# Altium PCB file_6967cc6d432e67.85601328.pcbdoc
Units mm, origin at the board's own origin, x right, y up, seen from the top; angles counter-clockwise.
Board outline 69.52 x 52.06 mm, 2 copper layers (Top, Bottom), stack 1.57 mm thick; 47 components, 38 nets, 166 pads, 70 vias.
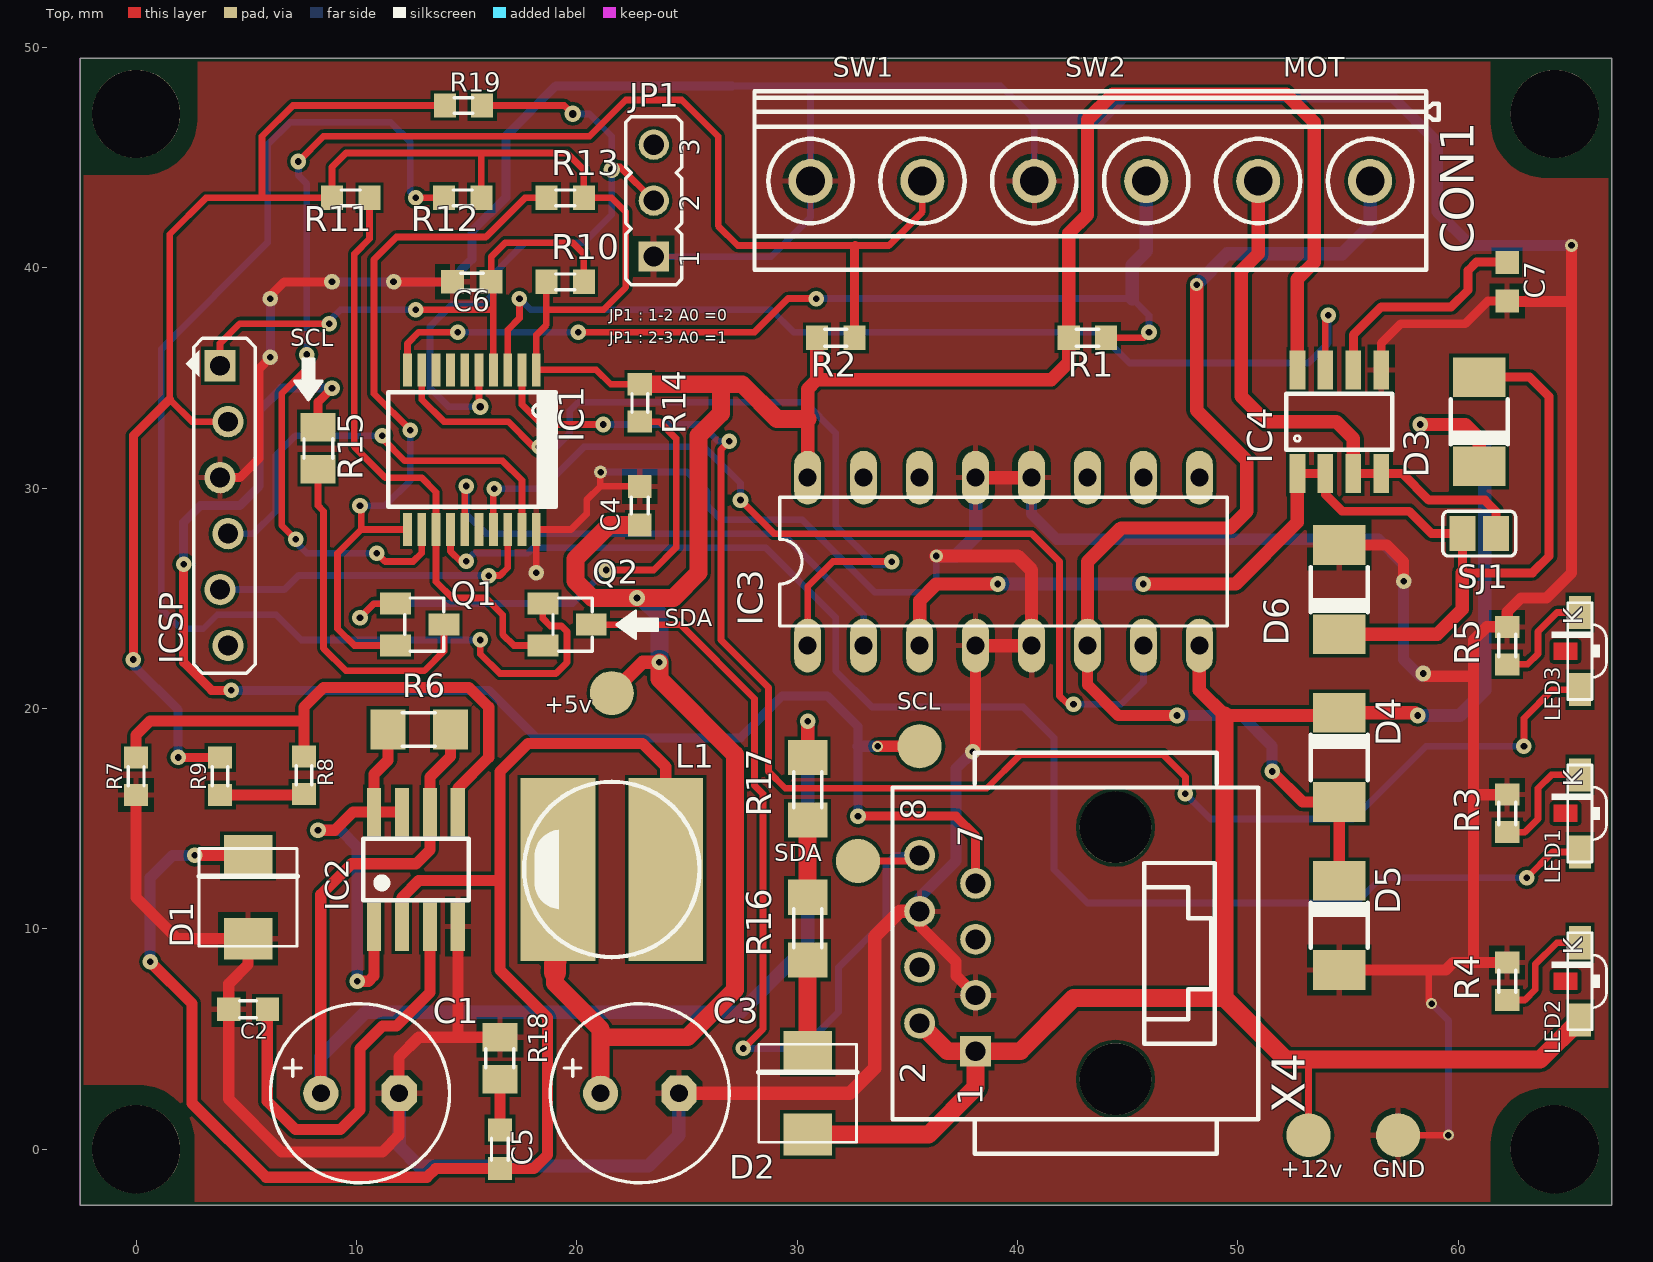
[diagram p0: Top view]
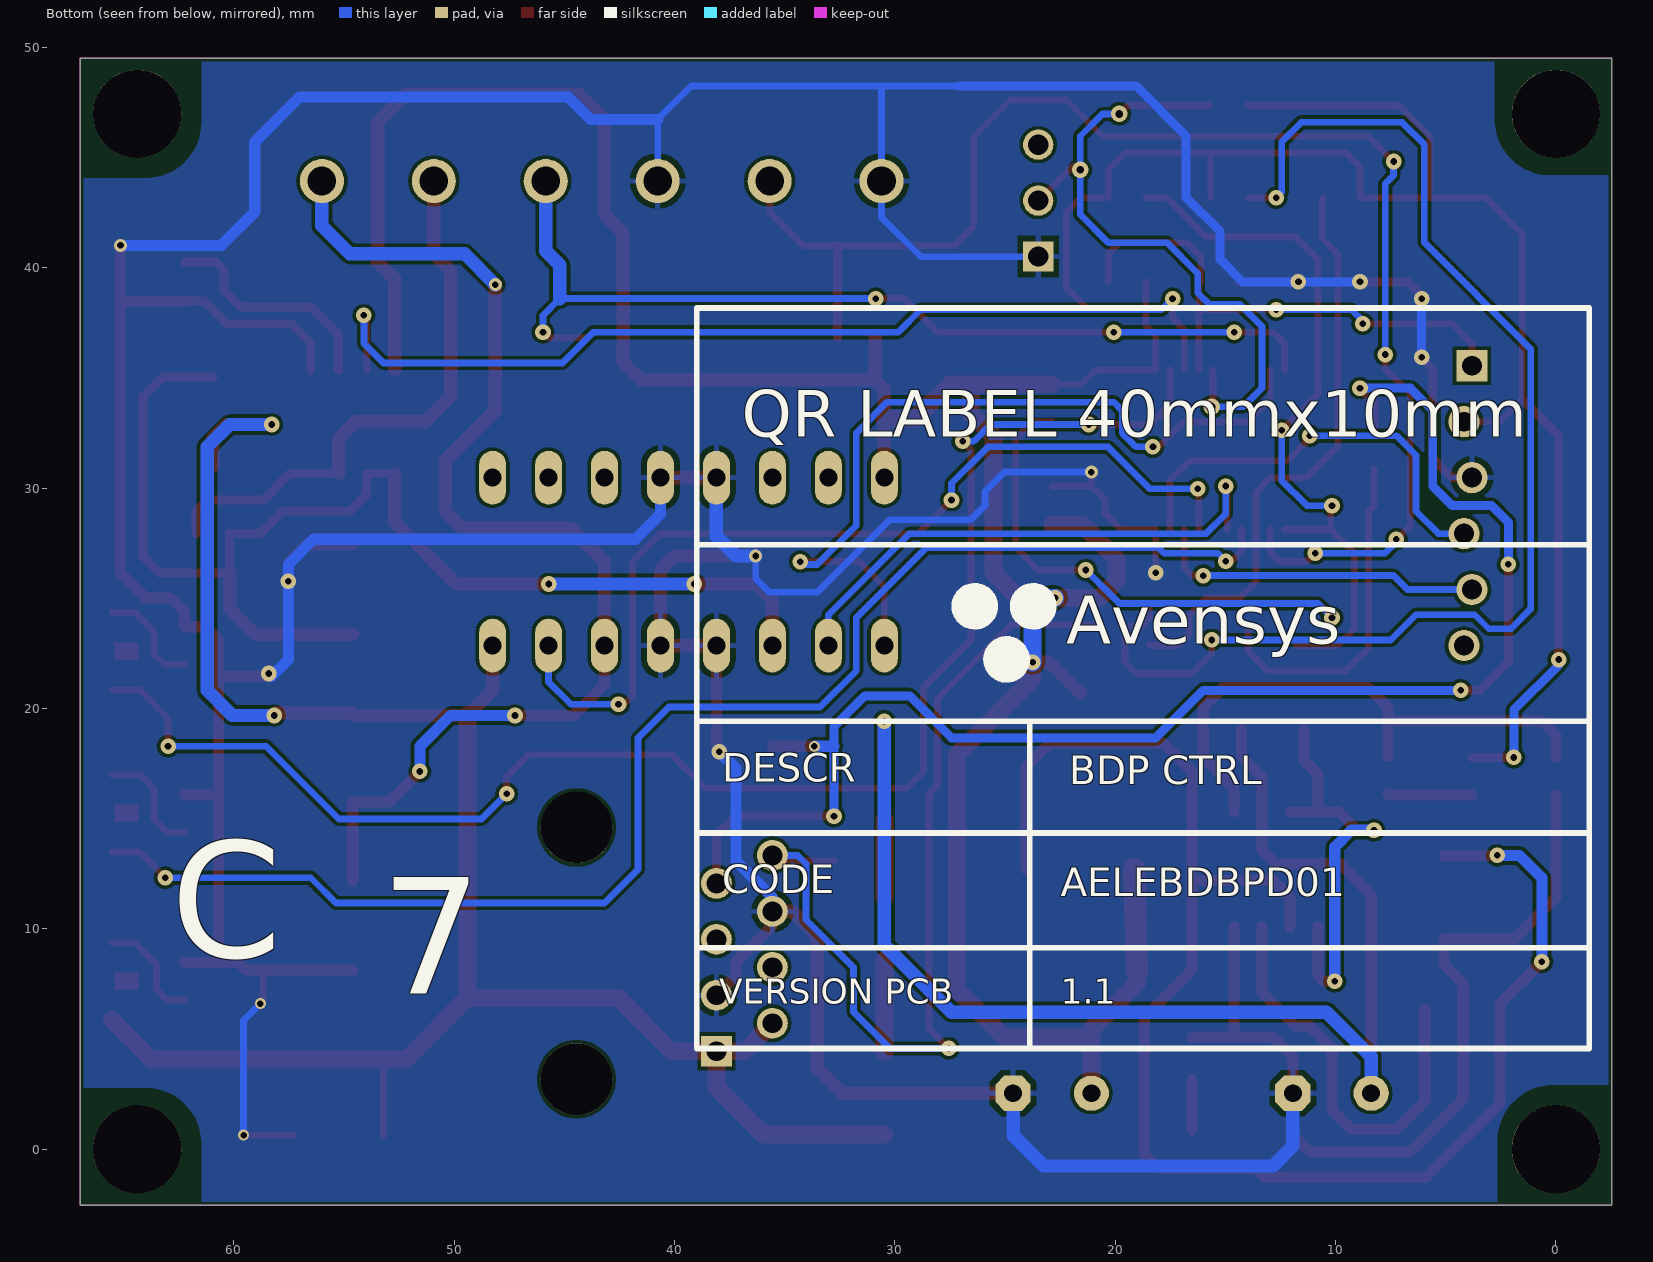
[diagram p1: Bottom view, seen from below]

## Layer stack, top to bottom
Top Solder: solder mask 0.0102, Solder Resist, Dk 3.5
Top: signal copper 0.035
Dielectric 1: core 1.5, FR-4, Dk 4.8
Bottom: signal copper 0.035
Bottom Solder: solder mask 0.0102, Solder Resist, Dk 3.5

## Board outline
-2.54,-2.54 66.98,-2.54 66.98,49.52 -2.54,49.52

## Design rules (kind name [scope] priority, off if disabled: settings)
Clearance [All] p1: gap=0.152 except(0: SMDPad-SMDPad SMDPad-THPad SMDPad-Via)
Clearance "Clearance (Same Net)" [All] p2: gap=0 except(0.152: SMDPad-SMDPad SMDPad-THPad SMDPad-Via)
HoleSize HoleSize_1 [All] p1: absolutevalues=TRUE maxlimit=2540 minlimit=0.35 maxpercent=80.000 minpercent=20.000
HoleSize [All] p2: absolutevalues=TRUE maxlimit=2.54 minlimit=0.025 maxpercent=80.000 minpercent=20.000
HoleToHoleClearance mdViaViaSameLayer [All] p1: gap=0.152 allowstackedmicrovias=TRUE
HoleToHoleClearance [All] p2: gap=0.254 allowstackedmicrovias=TRUE
PasteMaskExpansion mlMinCreamFrame [All] p1: expansion=0
PasteMaskExpansion [All] p2: expansion=0
PolygonConnect ThermalVias [IsVia] p1: connectstyle=Direct reliefconductorwidth=0.254 reliefentries=4 polygonreliefangle="90 Angle" airgapwidth=0.254
PolygonConnect [All] p2: connectstyle=Relief reliefconductorwidth=0.254 reliefentries=4 polygonreliefangle="90 Angle" airgapwidth=0.254
RoutingVias [All] p1: holewidth=0.711 width=1.27 viastyle="Through Hole" minholewidth=0.711 minwidth=1.27 maxholewidth=0.711 maxwidth=1.27
SilkToSilkClearance [All] p1 off: silktosilkclearance=0.254
SilkToSolderMaskClearance [IsPad] p1 off: minsilkscreentomaskgap=0.254 clearancetoexposedcopper=TRUE
SolderMaskExpansion mlMinStopFrame [All] p1: expansion=0.102
SolderMaskExpansion [All] p2: expansion=0.102
Width Width_1 [All] p1: maxlimit=2540 minlimit=0.152 preferedwidth=0.254
Width [All] p2: maxlimit=0.254 minlimit=0.254 preferedwidth=0.254
25 further rules are at their usual default settings.

## Components (designator, comment, footprint, x,y, rotation, side; value= is the part's Value field where it differs from the comment)
C1 "100uF 50V" E3,5-8 10.16,2.54 r0 top
C2 "470pF(0603)" C0603K 5.08,6.35 r180 top
C3 "330uF 16V" E3,5-8 22.86,2.54 r0 top
C4 "100nF(0603)" C0603K 22.86,29.21 r90 top
C5 "470pF(0603)" C0603K 16.51,0 r270 top
C6 "100nF(0603)" C0603K 15.24,39.37 r180 top
C7 "1nF(0603)" C0603K 62.23,39.37 r90 top
CON1 "Comment" MKDSN1,5/6-5,08 56.007,43.942 r180 top
D1 "" DO-214AC#1 5.08,11.43 r90 top
D2 "" DO-214AC#1 30.48,2.54 r90 top
D3 "1N4001" DO-214AC#2 60.96,33.02 r90 top
D4 "1N4001" DO-214AC#2 54.61,17.78 r270 top
D5 "1N4001" DO-214AC#2 54.61,10.16 r270 top
D6 "1N4001" DO-214AC#2 54.61,25.4 r90 top
IC1 "PIC16F1508_I/SS" MICROCHIP_13_SSOP20 15.24,31.75 r180 top
IC2 "CLIMA_LIB_MC34063EBD" CLIMA_LIB_SO8_PWR 12.7,12.7 r0 top
IC3 "L293D" DIL16 39.37,26.67 r0 top
IC4 "ACS712" SO08 54.61,33.02 r0 top
ICSP "" 1X06 3.81,29.21 r270 top
JP1 "" JP2R 23.495,43.053 r90 top
L1 "VLP8040T-181M" L_SMD_8X8 21.59,12.7 r180 top
LED1 "" CLIMA_LIB_LED_SMD_1204 65.532,15.24 r90 top
LED2 "" CLIMA_LIB_LED_SMD_1204 65.532,7.62 r90 top
LED3 "" CLIMA_LIB_LED_SMD_1204 65.532,22.606 r90 top
Q1 "2N7002,215" SOT23 12.87,23.81 r270 top
Q2 "2N7002,215" SOT23 19.56,23.81 r270 top
R1 "10K" RESISTOR_R0603 43.18,36.83 r180 top
R2 "10K" RESISTOR_R0603 31.75,36.83 r180 top
R3 "1K" RESISTOR_R0603 62.23,15.24 r90 top
R4 "1K" RESISTOR_R0603 62.23,7.62 r90 top
R5 "1K" RESISTOR_R0603 62.23,22.86 r90 top
R6 "0R33(1206)" R1206 12.852,19.05 r180 top
R7 "10K" R0603 0,16.93 r90 top
R8 "15K" R0603 7.62,16.979 r270 top
R9 "15K" R0603 3.81,16.93 r90 top
R10 "10K" R0603 19.47,39.37 r0 top
R11 "15K" R0603 9.74,43.18 r180 top
R12 "22R" R0603 14.82,43.18 r180 top
R13 "15K" R0603 19.47,43.18 r0 top
R14 "22R" R0603 22.86,33.87 r270 top
R15 "6R8(0805)" M0805 8.255,31.811 r270 top
R16 "0R33(1206)" R1206 30.48,10.008 r90 top
R17 "0R33(1206)" R1206 30.48,16.358 r90 top
R18 "6R8 (0805)" M0805 16.51,4.13 r90 top
R19 "10K" R0603 14.859,47.371 r0 top
SJ1 "" JUMPER_SJ 60.96,27.94 r180 top
X4 "" MY_TOUCHSCREEN_RJ45-VERTICAL 44.45,8.89 r90 top

## Footprints (in the part's own frame and the unit in brackets; to place one, negate y for a bottom-side part, rotate by r counter-clockwise, add the part's x,y. Pads: shape width x height; smd on the part's side, far side on the other; paste and mask are expansions set on the pad)
1X06 [mil] "1X06"
  rect 56x56 hole 35.43: 1(-250,0)
  round 56 hole 35.43: 2(-150,14.17) 3(-50,0) 4(50,14.17) 5(150,0) 6(250,14.17)
  silkscreen extent -299,-61 299,63
C0603K [mm] "C0603K"
  rect 1.05x1.08 smd: 1(-0.875,0) 2(0.875,0)
CLIMA_LIB_LED_SMD_1204 [mm] "CLIMA_LIB_LED_SMD_1204"
  rect 1.5x1 smd: 1.K(1.75,0) 2.A(-1.75,0)
  Top region: -0.4,0.1 0.4,0.1 0.4,1.2 -0.4,1.2
  silkscreen extent -2.2,-1.21 2.2,1.3
CLIMA_LIB_SO8_PWR [mm] "CLIMA_LIB_SO8_PWR"
  rect 0.65x2.2 smd: 1(-1.905,-2.6) 2(-0.635,-2.6) 3(0.635,-2.6) 4(1.905,-2.6) 5(1.905,2.6) 6(0.635,2.6) 7(-0.635,2.6) 8(-1.905,2.6)
  silkscreen extent -2.4,-1.4 2.4,1.39
DIL16 [mil] "DIL16"
  oval 48x96 hole 32: 1(-350,-150) 2(-250,-150) 3(-150,-150) 4(-50,-150) 5(50,-150) 6(150,-150) 7(250,-150) 8(350,-150) 9(350,150) 10(250,150) 11(150,150) 12(50,150) 13(-50,150) 14(-150,150) 15(-250,150) 16(-350,150)
  silkscreen extent -400,-115 400,115
DO-214AC#1 [mm] "DO-214AC"
  rect 1.9x2.2 smd: A(-1.88,0) K(1.88,0)
  silkscreen extent -2.22,-2.22 2.22,2.22
DO-214AC#2 [mm] "DO-214AC"
  rect 1.8x2.4 smd: A(2.025,0) C(-2.025,0)
  silkscreen extent -1.07,-1.3 1.02,1.3
E3,5-8 [mil] "E3,5-8"
  round 63 hole 32: +(-70,0)
  oct 63x63 hole 32: -(70,0)
  silkscreen extent -160,-160 160,160
JP2R [mil] "JP2R"
  rect 54x54 hole 36: 1(-100,0)
  round 54 hole 36: 2(0,0) 3(100,0)
  silkscreen extent -150,-50 150,50
JUMPER_SJ [mil] "JUMPER_SJ"
  rect 46x63 smd: 1(-30,0) 2(30,0)
  silkscreen extent -65,-40 65,40
L_SMD_8X8 [mm] "L_SMD_8X8"
  rect 3.4x8.3 smd: P$1(-2.45,0) P$2(2.45,0)
  silkscreen extent -3.98,-3.98 3.98,3.98
M0805 [mm] "M0805"
  rect 1.3x1.6 smd: 1(-0.95,0) 2(0.95,0)
MICROCHIP_13_SSOP20 [mm] "MICROCHIP_13_SSOP20"
  rect 0.4x1.5 smd: 1(-2.925,-3.625) 2(-2.275,-3.625) 3(-1.625,-3.625) 4(-0.975,-3.625) 5(-0.325,-3.625) 6(0.325,-3.625) 7(0.975,-3.625) 8(1.625,-3.625) 9(2.275,-3.625) 10(2.925,-3.625) 11(2.925,3.625) 12(2.275,3.625) 13(1.625,3.625) 14(0.975,3.625) 15(0.325,3.625) 16(-0.325,3.625) 17(-0.975,3.625) 18(-1.625,3.625) 19(-2.275,3.625) 20(-2.925,3.625)
  silkscreen extent -3.9,-2.6 3.8,2.6
MKDSN1,5/6-5,08 [mm] "MKDSN1,5/2-5,08"
  round 2 hole 1.3: 1(0,0) 2(5.08,0) 3(10.16,0) 4(15.24,0) 5(20.32,0) 6(25.4,0)
  silkscreen extent -3.11,-4.07 27.94,4.03, body extent -3.08,-4.04 27.97,4.06, height 10.03
MY_TOUCHSCREEN_RJ45-VERTICAL [mm] "MY_TOUCHSCREEN_RJ45-VERTICAL"
  round 3.25 hole 3.25: 1(-5.715,0) 1(5.715,0)
  rect 1.4x1.4 hole 0.9: 1(-4.445,6.35)
  round 1.4 hole 0.9: 2(-3.175,8.89) 3(-1.905,6.35) 4(-0.635,8.89) 5(0.635,6.35) 6(1.905,8.89) 7(3.175,6.35) 8(4.445,8.89)
  silkscreen extent -9.1,-6.47 9.1,10.12
R0603 [mm] "R0603"
  rect 1x1.1 smd: 1(-0.85,0) 2(0.85,0)
  silkscreen extent -0.43,-0.36 0.43,0.36
R1206 [mm] "R1206"
  rect 1.6x1.803 smd: 1(-1.422,0) 2(1.422,0)
RESISTOR_R0603 [mm] "RESISTOR_R0603"
  rect 1x1.1 smd: 1(-0.85,0) 2(0.85,0)
SO08 [mm] "SO08"
  rect 0.72x1.78 smd: 1(-1.905,-2.35) 2(-0.635,-2.35) 3(0.635,-2.35) 4(1.905,-2.35) 5(1.905,2.35) 6(0.635,2.35) 7(-0.635,2.35) 8(-1.905,2.35)
  silkscreen extent -2.4,-1.26 2.4,1.26
SOT23 [mm] "SOT23"
  rect 1x1.4 smd: 1(-0.95,-1.1) 2(0.95,-1.1) 3(0,1.1)

## Part data
C1 C3: library part E3,5-8
C2 C4 C5 C6 C7: library part C0603K
D1 D2 D3 D4 D5 D6: library part DO-214AC
IC1: library part MICROCHIP_13_SSOP20
IC2: library part CLIMA_LIB_SO8_PWR
IC3: library part DIL16
IC4: library part SO08
ICSP: library part 1X06
JP1: library part JP2R
L1: library part L_SMD_8X8
LED1 LED2 LED3: library part CLIMA_LIB_LED_SMD_1204
Q1 Q2: library part SOT23
R1 R2 R3 R4 R5: library part RESISTOR_R0603
R6 R16 R17: library part R1206
R7 R8 R9 R10 R11 R12 R13 R14 R19: library part R0603
R15 R18: library part M0805
SJ1: library part JUMPER_SJ
X4: library part MY_TOUCHSCREEN_RJ45-VERTICAL

## Free pads (board coordinates)
  round 4 hole 4: 1(0,0) 1(0,46.99) 1(64.389,0) 1(64.389,46.99)
  round 2 smd: 1(53.213,0.635) 2(57.277,0.635) 3(21.59,20.701) 4(35.56,18.288) 5(32.766,13.081)

## Via types
v1: diameter 0.706/0.706 (per signal layer), hole 0.3, Top to Bottom, 60 vias
v2: diameter 0.6, hole 0.3, Top to Bottom, 4 vias
v3: diameter 0.756/0.756 (per signal layer), hole 0.35, Top to Bottom, 3 vias
v4: diameter 0.5, hole 0.3, Top to Bottom, 3 vias

## Nets (pads, with @x,y where several pads share a name; then routed paths per layer and width w, separated by ;. In a path a pad name is that pad's centre, name@x,y a point inside that pad or via, vN(x,y) a via of type N, cw(c..) or ccw(c..) an arc to the next point about the centre after c; other vN are vias at no path point)
!MCLR: C6.1 IC1.4 ICSP.1 R10.2 | length 25.2
  Top w0.305: ICSP.1 3.81,36.576 4.699,37.465 v1(8.763,37.465) ; v1(12.7,38.1) 16.215,38.1 ; IC1.4 16.215,38.1 ; R10.2 20.32,40.64 19.812,41.148 16.764,41.148 16.115,40.499 C6.1 16.215,39.27 16.215,38.1
  Bottom w0.305: v1(8.763,37.465) 8.763,37.592 9.271,38.1 v1(12.7,38.1)
+5V: C3.+ C4.1 IC1.1 IC3.16 IC4.8 ICSP.2 L1.P$2 pad.3 R1.2 R2.2 R9.2 R10.1 R11.2 R12.1 R13.2 R14.1 R19.1 | length 206.9
  Top w0.305: ICSP.2 2.54,33.02 1.524,34.036 1.524,41.529 3.175,43.18 5.715,43.18 ; R19.1 7.112,47.371 5.715,45.974 5.715,43.18 ; R12.1 15.67,45.134 15.748,45.212 ; R10.1 18.62,38.1 ; R14.1 21.541,34.72 20.886,35.375 IC1.1 18.165,36.961 18.62,37.416 18.62,38.1 ; 5.715,43.18 R11.2 8.89,44.577 9.525,45.212 15.748,45.212 ; 15.748,45.212 19.558,45.212 20.32,44.45 R13.2 21.59,43.18 22.225,42.545 22.225,39.116 21.209,38.1 18.62,38.1
  Top w0.406: v1(-0.127,22.225) -0.127,32.385 1.524,34.036 ; v1(1.905,17.78) 1.905,17.653 2.032,17.78 R9.2
  Top w0.61: pad.3 22.987,22.098 v1(23.749,22.098) ; IC3.16 30.48,33.147 30.48,34.505 30.9,34.925 ; R2.2 30.9,34.925 ; IC4.8 52.705,39.497 53.467,40.259 53.467,46.609 52.197,47.879 44.323,47.879 43.18,46.736 43.18,42.418 42.33,41.568 R1.2 42.33,35.726 41.529,34.925 30.9,34.925
  Top w0.813: 19.013,8.038 19.013,7.53 21.082,5.461 21.082,5.08 ; C3.+ 21.082,5.08 ; C4.1 21.477,28.335 19.939,26.797 19.939,25.781 20.701,25.019 v1(22.733,25.019) 24.384,25.019 25.527,26.162 25.527,32.385 26.543,33.401 26.543,34.72 ; R14.1 26.543,34.72 ; v1(23.749,22.098) 23.749,21.336 27.178,17.907 27.178,7.239 25.019,5.08 21.082,5.08 ; 30.48,33.147 29.083,33.147 27.51,34.72 26.543,34.72
  Top w1.016: 19.013,8.038 L1.P$2
  Bottom w0.406: v1(-0.127,22.225) -0.127,21.971 1.905,19.939 v1(1.905,17.78)
  Bottom w0.813: v1(22.733,25.019) 22.987,25.019 23.749,24.257 v1(23.749,22.098)
+12V: D2.A D3.C D4.C IC3.8 LED2.2.A pad.1@53.213,0.635 X4.1@38.1,4.445 X4.2 | length 94.4
  Top w0.305: pad.1@53.213,0.635 53.213,4.064
  Top w0.61: IC3.8 48.26,20.828 49.403,19.685 54.49,19.685 D4.C 58.046,19.805 v1(58.166,19.685) ; v1(58.293,32.893) 60.325,32.893 60.96,32.258 D3.C
  Top w0.813: D2.A 35.966,0.66 38.1,2.794 X4.1@38.1,4.445 ; X4.2 36.83,4.445 X4.1@38.1,4.445 ; 49.403,19.685 49.403,6.858 ; LED2.2.A 63.726,4.064 53.213,4.064 52.197,4.064 49.403,6.858 ; X4.1@38.1,4.445 40.132,4.445 42.545,6.858 49.403,6.858
  Bottom w0.61: v1(58.166,19.685) 60.071,19.685 61.214,20.828 61.214,31.877 60.198,32.893 v1(58.293,32.893)
GND: C1.- C2.2 C3.- C4.2 C6.2 C7.1 CON1.4 CON1.6 D1.A D5.A D6.A IC1.20 IC2.4 IC3.4 IC3.5 IC3.12 IC3.13 IC4.5 ICSP.3 JP1.1 pad.2 R3.2 R4.2 R5.2 R7.1 R18.2 X4.3 X4.6 | length 337.4
  Top w0.305: v1(18.161,26.162) 18.165,26.166 IC1.20 19.743,28.125 20.447,28.829 20.447,29.464 21.068,30.085 21.068,30.72 v2(21.082,30.734) ; 21.082,30.085 C4.2 ; pad.2 v4(59.563,0.635) ; 58.674,8.135 58.674,6.731 v4(58.801,6.604)
  Top w0.406: ICSP.3 4.699,30.48 5.588,31.369 5.588,35.433 v1(6.096,35.941) ; v1(6.096,38.608) 6.096,38.735 6.731,39.37 v1(8.89,39.37) ; v1(11.684,39.37) C6.2 ; IC4.5 56.515,36.576 57.404,37.465 60.325,37.465 61.355,38.495 C7.1
  Top w0.508: R7.1 0,11.43 1.88,9.55 D1.A 5.08,8.382 4.205,7.507 C2.2 4.205,2.272 6.604,-0.127 11.176,-0.127 11.938,0.635 C1.- 11.938,4.191 12.827,5.08 14.605,5.08 ; IC2.4 14.605,5.08 ; R18.2 14.605,5.08 ; X4.6 35.56,10.16 37.211,8.509 37.211,7.874 X4.3 ; v1(37.973,18.034) 38.1,18.161 IC3.4 ; D5.A 58.674,8.135 59.443,8.135 59.778,8.47 60.833,8.47 ; D6.A 56.776,27.425 57.531,26.67 v1(57.531,25.781) ; v1(58.42,21.59) 58.547,21.463 60.706,21.463 ; R4.2 60.833,8.47 ; R3.2 60.794,16.09 60.706,16.002 ; C7.1 62.244,38.481 65.151,38.481 ; v2(65.151,41.021) 65.151,38.481 ; 60.706,16.002 60.706,8.597 60.833,8.47 ; 60.706,16.002 60.706,21.463 ; 60.706,21.463 60.706,23.114 61.302,23.71 R5.2 62.23,24.384 62.865,25.019 64.008,25.019 65.151,26.162 65.151,38.481
  Top w0.61: C3.- 32.385,2.54 33.528,3.683 33.528,9.652 34.671,10.795 X4.6 ; v2(36.322,26.924) 40.005,26.924 40.64,26.289 IC3.5 IC3.4 ; IC3.13 IC3.12
  Bottom w0.305: v2(21.082,30.734) 25.019,30.734 25.908,29.845 25.908,29.21 26.543,28.575 30.226,28.575 33.528,25.273 35.687,25.273 36.322,25.908 v2(36.322,26.924) ; JP1.1 28.829,40.513 30.607,42.291 CON1.6 30.607,48.26 ; 27.051,48.26 30.607,48.26 ; CON1.4 40.767,46.736 39.243,48.26 30.607,48.26 ; v4(58.801,6.604) 59.563,5.842 v4(59.563,0.635)
  Bottom w0.406: v1(6.096,35.941) v1(6.096,38.608) ; v1(8.89,39.37) v1(11.684,39.37) 14.224,39.37 15.24,40.386 15.24,41.656 16.789,43.205 16.789,45.999 19.05,48.26 27.051,48.26
  Bottom w0.508: X4.6 35.56,11.43 37.211,13.081 37.211,17.272 v1(37.973,18.034) ; IC3.12 40.64,28.829 41.783,27.686 56.388,27.686 57.531,26.543 v1(57.531,25.781) 57.531,22.225 58.293,21.463 v1(58.42,21.59) ; 40.767,46.736 43.815,46.736 44.831,47.752 57.023,47.752 59.055,45.72 59.055,42.545 60.579,41.021 v2(65.151,41.021)
  Bottom w0.61: C1.- 11.938,0.127 12.827,-0.762 23.241,-0.762 24.638,0.635 C3.- ; v2(36.322,26.924) 37.211,26.924 38.1,27.813 IC3.13
ICSPDAT: IC1.19 ICSP.4 | length 19.8
  Top w0.305: v1(11.176,32.385) 11.176,32.258 12.192,31.242 16.637,31.242 17.515,30.364 IC1.19
  Bottom w0.305: ICSP.4 5.334,27.94 6.35,28.956 6.35,31.496 7.239,32.385 v1(11.176,32.385)
ISPCLK: IC1.18 ICSP.5 | length 15.2
  Top w0.305: v1(16.002,26.035) 16.51,26.035 16.865,26.39 IC1.18
  Bottom w0.305: ICSP.5 6.731,25.4 7.366,26.035 v1(16.002,26.035)
N$1: D3.A D6.C IC3.3 IC4.1 IC4.2 SJ1.2 | length 56.6
  Top w0.406: IC4.1 IC4.2 53.975,29.718 54.737,28.956 57.785,28.956 58.801,27.94 SJ1.2 60.198,26.162 63.373,26.162 64.135,26.924 64.135,34.163 63.253,35.045 D3.A
  Top w0.61: IC3.3 35.56,24.892 36.322,25.654 v1(39.116,25.654) ; v1(45.72,25.654) 49.911,25.654 52.705,28.448 IC4.1 ; D6.C 59.062,23.375 60.198,24.511 60.198,26.162
  Bottom w0.61: v1(39.116,25.654) v1(45.72,25.654)
N$2: CON1.5 IC1.12 R2.1 | length 66.3
  Top w0.305: v1(7.239,27.686) 6.604,28.321 6.604,34.29 7.747,35.433 v1(7.747,36.068) ; v1(7.366,44.831) 8.509,45.974 20.574,45.974 22.225,47.625 24.765,47.625 26.416,45.974 26.416,41.91 27.305,41.021 32.639,41.021 34.163,41.021 35.687,42.545 CON1.5 ; v1(10.922,27.051) 11.303,26.67 12.573,26.67 12.965,27.062 IC1.12
  Top w0.406: R2.1 32.6,40.982 32.639,41.021
  Bottom w0.305: v1(7.239,27.686) 7.239,27.559 7.747,27.051 v1(10.922,27.051) ; v1(7.366,44.831) 7.366,44.196 7.747,43.815 v1(7.747,36.068)
N$3: CON1.1 D4.A D5.C IC3.6 | length 53.9
  Top w0.508: IC3.6 43.18,21.082 44.577,19.685 v1(47.244,19.685) ; v1(51.562,17.145) 52.952,15.755 D4.A D5.C
  Top w0.61: IC3.6 43.18,26.67 44.704,28.194 49.657,28.194 50.419,28.956 50.419,31.242 48.133,33.528 v2(48.133,39.243)
  Bottom w0.508: v1(47.244,19.685) 50.165,19.685 51.562,18.288 v1(51.562,17.145)
  Bottom w0.61: v2(48.133,39.243) 49.53,40.64 54.737,40.64 56.007,41.91 CON1.1
N$4: IC2.1 IC2.7 IC2.8 R6.2 | length 19.4
  Top w0.508: v1(8.255,14.478) 9.017,14.478 9.839,15.3 IC2.8 ; v1(10.033,7.62) 10.541,7.62 10.795,7.874 IC2.1 ; R6.2 11.43,17.653 10.795,17.018 IC2.8 ; IC2.7 IC2.8
  Bottom w0.508: v1(8.255,14.478) 9.271,14.478 10.033,13.716 v1(10.033,7.62)
N$5: C5.2 D1.K IC2.2 L1.P$1 | length 71.4
  Top w0.508: v1(0.635,8.509) 2.54,6.604 2.54,2.085 5.895,-1.27 13.208,-1.27 13.603,-0.875 C5.2 18.048,-0.875 18.669,-0.254 18.669,5.969 16.51,8.128 16.51,12.192 ; v1(2.667,13.335) 5.055,13.335 D1.K ; IC2.2 12.065,11.43 12.827,12.192 16.51,12.192 ; L1.P$1 24.04,17.362 22.987,18.415 17.78,18.415 16.51,17.145 16.51,12.192
  Bottom w0.508: v1(0.635,8.509) 0.635,12.319 1.651,13.335 v1(2.667,13.335)
N$6: C2.1 IC2.3 | length 19.3
  Top w0.508: C2.1 5.955,2.173 7.239,0.889 9.271,0.889 10.16,1.778 10.16,4.572 11.176,5.588 11.811,5.588 13.335,7.112 IC2.3
N$7: LED1.1.K R3.1 | length 5.2
  Top w0.305: R3.1 63.031,14.39 63.627,14.986 63.627,16.383 64.234,16.99 LED1.1.K
N$8: IC2.5 R7.2 R8.1 | length 25.6
  Top w0.508: R7.2 0,18.796 0.635,19.431 7.62,19.431 ; R8.1 7.62,19.431 ; IC2.5 14.605,16.383 16.002,17.78 16.002,20.066 15.113,20.955 13.97,20.955 13.462,20.955 8.509,20.955 7.62,20.066 7.62,19.431
N$9: R8.2 R9.1 | length 3.8
  Top w0.508: R9.1 7.571,16.08 R8.2
N$10: LED2.1.K R4.1 | length 5
  Top w0.305: R4.1 63.031,6.77 63.5,7.239 63.5,8.382 64.488,9.37 LED2.1.K
N$11: LED3.1.K R5.1 | length 4.9
  Top w0.305: R5.1 63.158,22.01 63.627,22.479 63.627,23.495 64.488,24.356 LED3.1.K
N$12: IC1.15 IC3.2 | length 24.6
  Top w0.305: IC1.15 14.915,29.901 14.986,29.972 v1(14.986,30.099)
  Bottom w0.305: v1(14.986,30.099) 14.986,28.829 15.875,27.94 29.337,27.94 33.02,24.257 IC3.2
N$13: IC1.17 IC3.7 | length 43
  Top w0.305: IC1.17 16.215,29.931 v1(16.256,29.972) ; v1(27.432,29.464) 28.956,27.94 40.64,27.94 41.91,26.67 41.91,20.574 42.291,20.193 v1(42.545,20.193)
  Bottom w0.305: v1(16.256,29.972) 18.415,29.972 20.32,31.877 25.781,31.877 27.432,30.226 v1(27.432,29.464) ; v1(42.545,20.193) 44.704,20.193 45.72,21.209 IC3.7
N$14: IC1.13 Q2.2 R11.1 | length 26.8
  Top w0.305: R11.1 10.59,41.324 9.906,40.64 9.906,31.877 11.303,30.48 12.954,30.48 13.615,29.819 IC1.13 13.615,25.755 14.351,25.019 15.875,25.019 16.637,24.257 16.637,23.368 17.145,22.86 Q2.2
N$15: CON1.3 IC1.10 R1.1 | length 44.4
  Top w0.305: IC1.10 12.315,36.572 12.827,37.084 v1(14.605,37.084) ; v1(20.066,37.084) 28.067,37.084 29.591,38.608 v1(30.861,38.608) ; R1.1 45.72,36.83 v1(45.974,37.084)
  Bottom w0.305: v1(14.605,37.084) v1(20.066,37.084) ; v1(30.861,38.608) 45.212,38.608 45.974,37.846 v1(45.974,37.084)
  Bottom w0.61: 45.212,38.608 45.212,40.132 45.847,40.767 CON1.3
N$16: IC1.9 IC3.1 | length 37.8
  Top w0.305: IC1.9 12.965,34.025 13.97,33.02 16.891,33.02 18.034,31.877 v1(18.288,31.877) ; IC3.1 30.48,25.527 31.623,26.67 v1(34.29,26.67)
  Bottom w0.305: v1(18.288,31.877) 19.05,31.877 19.685,32.512 19.685,33.528 20.066,33.909 30.353,33.909 31.75,32.512 31.75,28.321 33.528,26.543 34.417,26.543 v1(34.29,26.67)
N$17: CON1.2 IC4.3 IC4.4 SJ1.1 | length 25.8
  Top w0.406: IC4.3 IC4.4 57.468,30.67 58.674,29.464 61.214,29.464 61.722,28.956 SJ1.1
  Top w0.61: CON1.2 50.927,40.64 50.165,39.878 50.165,34.163 51.308,33.02 54.483,33.02 55.245,32.258 IC4.3
N$18: C5.1 R18.1 | length 2.3
  Top w0.508: C5.1 R18.1
N$19: IC1.5 JP1.2 R19.2 | length 30.7
  Top w0.305: IC1.5 15.565,33.838 15.621,33.782 v3(15.621,33.703) ; R19.2 19.431,47.371 v3(19.812,46.99) ; v3(21.59,44.45) 21.59,44.577 21.971,44.577 JP1.2
  Bottom w0.305: v3(15.621,33.703) 14.176,33.703 13.335,34.544 13.335,37.338 14.351,38.354 15.748,38.354 16.256,38.862 16.256,39.751 17.653,41.148 20.32,41.148 21.59,42.418 v3(21.59,44.45) 21.59,45.974 20.574,46.99 v3(19.812,46.99)
N$20: IC1.14 LED1.2.A | length 65.3
  Top w0.305: IC1.14 14.265,27.137 14.732,26.67 14.986,26.67 v1(14.986,26.693) ; v1(63.119,12.319) 64.29,13.49 LED1.2.A
  Bottom w0.305: v1(14.986,26.693) 15.344,27.051 17.78,27.051 18.034,27.305 28.575,27.305 31.75,24.13 31.75,21.717 33.401,20.066 40.259,20.066 41.656,18.669 41.656,12.7 43.18,11.176 55.372,11.176 56.515,12.319 v1(63.119,12.319)
N$21: Q1.3 R15.2 | length 15.7
  Top w0.305: R15.2 8.255,29.21 8.509,28.956 8.509,22.733 9.525,21.717 13.081,21.717 13.97,22.606 Q1.3
N$22: IC1.3 IC4.7 | length 45.5
  Top w0.305: IC1.3 16.865,37.185 17.399,37.719 v1(17.399,38.608) ; IC4.7 53.975,37.719 v1(54.102,37.846)
  Bottom w0.305: v1(17.399,38.608) 17.907,38.1 28.829,38.1 29.845,37.084 43.688,37.084 45.085,35.687 53.213,35.687 54.102,36.576 v1(54.102,37.846)
N$23: IC1.2 LED3.2.A | length 70.3
  Top w0.305: IC1.2 17.515,33.793 18.415,32.893 v1(21.209,32.893) ; v1(26.924,32.131) 26.543,31.75 26.543,23.114 28.702,20.955 28.702,17.145 29.464,16.383 38.608,16.383 40.132,17.907 46.609,17.907 47.625,16.891 v1(47.625,16.129) ; v1(62.992,18.288) 62.992,19.558 64.29,20.856 LED3.2.A
  Bottom w0.305: v1(21.209,32.893) 25.654,32.893 26.416,32.131 v1(26.924,32.131) ; v1(47.625,16.129) 48.768,14.986 55.245,14.986 58.547,18.288 v1(62.992,18.288)
N$24: IC1.11 Q1.2 R13.1 | length 33.6
  Top w0.305: v1(10.16,29.21) 10.218,29.152 10.218,28.125 ; Q1.2 9.906,22.86 9.144,23.622 9.144,27.051 10.218,28.125 ; IC1.11 10.218,28.125 ; v1(12.446,32.639) 10.795,34.29 10.795,40.386 11.811,41.402 15.875,41.402 17.653,43.18 R13.1
  Bottom w0.305: v1(10.16,29.21) 11.303,29.21 12.446,30.353 v1(12.446,32.639)
N$25: C7.2 IC4.6 | length 10.5
  Top w0.406: IC4.6 55.245,36.957 56.515,38.227 59.69,38.227 60.452,38.989 60.452,39.878 60.833,40.259 62.216,40.259 C7.2
N$33: Q1.1 R14.2 | length 24.5
  Top w0.305: v1(10.16,24.13) 10.79,24.76 Q1.1 ; v1(21.336,26.289) 23.495,26.289 24.511,27.305 24.511,32.258 23.749,33.02 R14.2
  Bottom w0.305: v1(10.16,24.13) 10.795,24.765 19.812,24.765 v1(21.336,26.289)
N$35: Q2.1 R12.2 | length 58.4
  Top w0.305: v1(12.7,43.18) R12.2 ; v1(15.621,23.114) 15.621,22.479 16.51,21.59 19.05,21.59 19.558,22.098 19.558,23.495 19.304,23.749 18.796,23.749 18.46,24.085 Q2.1
  Bottom w0.305: v1(12.7,43.18) 12.446,43.434 12.446,45.72 11.557,46.609 6.985,46.609 5.969,45.593 5.969,41.148 1.143,36.322 1.143,24.511 2.032,23.622 3.048,23.622 3.683,24.257 6.35,24.257 7.493,23.114 v1(15.621,23.114)
N$36: D2.K R16.1 | length 4.2
  Top w0.813: D2.K R16.1
N$37: R16.2 R17.1 | length 3.5
  Top w0.813: R16.2 R17.1
SCL: pad.4 R15.1 X4.7 | length 67.8
  Top w0.406: v1(2.159,26.543) 2.159,22.098 3.429,20.828 v1(4.318,20.828) ; R15.1 8.255,33.909 v1(8.89,34.544) ; v1(32.766,15.113) 37.211,15.113 38.1,14.224 X4.7
  Top w0.508: v4(33.655,18.288) pad.4
  Bottom w0.406: v1(2.159,26.543) 2.159,28.448 2.921,29.21 4.699,29.21 5.588,30.099 5.588,33.528 6.604,34.544 v1(8.89,34.544) ; v1(4.318,20.828) 16.002,20.828 18.161,18.669 27.432,18.669 29.337,20.574 31.369,20.574 32.766,19.177 32.766,18.288 v1(32.766,15.113)
  Bottom w0.508: 32.766,18.288 v4(33.655,18.288)
SDA: pad.5 Q2.3 X4.8 | length 42.4
  Top w0.305: Q2.3 24.704,23.81 28.067,20.447 28.067,16.51 28.448,16.129 28.448,5.461 v1(27.559,4.572) ; pad.5 35.306,13.081 X4.8
  Bottom w0.305: v1(27.559,4.572) 30.226,4.572 31.877,6.223 31.877,8.255 34.036,10.414 34.036,12.954 34.417,13.335 X4.8
VCC: C1.+ IC2.6 R6.1 R17.2 | length 58.3
  Top w0.508: C1.+ 8.382,11.557 9.779,12.954 12.7,12.954 13.335,13.589 IC2.6 13.335,16.891 14.274,17.83 R6.1
  Top w0.61: R17.2 v1(30.48,19.431)
  Bottom w0.61: C1.+ 8.382,4.191 10.414,6.223 27.432,6.223 30.48,9.271 v1(30.48,19.431)
pads on no net: IC1.6 IC1.7 IC1.8 IC1.16 IC3.9 IC3.10 IC3.11 IC3.14 IC3.15 ICSP.6 JP1.3 X4.1@44.45,3.175 X4.1@44.45,14.605 X4.4 X4.5

## Polygon pours and split planes (outlines as drawn)
GND on Top "gnd-plane1" (solid, pour order 0): -2.54,44.196 0.254,44.196 ccw(c0.254,46.736) 2.794,46.736 2.794,49.52 61.468,49.52 61.468,46.609 ccw(c64.008,46.609) 64.008,44.069 66.98,44.069 66.98,2.794 64.008,2.794 ccw(c64.008,0.254) 61.468,0.254 61.468,-2.54 2.667,-2.54 2.667,0.381 ccw(c0.127,0.381) 0.127,2.921 -2.54,2.921 -2.54,44.196
GND on Bottom "gnd-plane2" (solid, pour order 2): -2.54,44.196 0.254,44.196 ccw(c0.254,46.736) 2.794,46.736 2.794,49.52 61.468,49.52 61.468,46.609 ccw(c64.008,46.609) 64.008,44.069 66.98,44.069 66.98,2.794 64.008,2.794 ccw(c64.008,0.254) 61.468,0.254 61.468,-2.54 2.667,-2.54 2.667,0.381 ccw(c0.127,0.381) 0.127,2.921 -2.54,2.921 -2.54,44.196

## Keep-outs
Keep-Out Layer:
  the board outline again, w0

## Silkscreen, mask and mechanical layers (free items; w line width, h text height)
Top Overlay:
  drawing of 42 lines, arcs and shapes, not listed
  text "SW1" at 31.623,48.387 h1.52
  text "SW2" at 42.164,48.387 h1.52
  text "MOT" at 52.07,48.387 h1.52
  text "JP1 : 1-2 A0 =0" at 21.463,37.592 h0.52
  text "JP1 : 2-3 A0 =1" at 21.463,36.576 h0.52
  text "SCL" at 6.985,36.195 h1.3
  text "SDA" at 24.003,23.495 h1.3
  text "SCL" at 34.544,19.685 h1.3
  text "+5v" at 18.542,19.558 h1.3
  text "SDA" at 28.956,12.827 h1.3
  text "+12v" at 51.943,-1.524 h1.3
  text "GND" at 56.134,-1.524 h1.3
Bottom Overlay:
  circle w0.38: c23.725,24.643 r0.87
  circle w0.38: c24.932,22.231 r0.87
  circle w0.38: c26.379,24.643 r0.87
  region: 24.062,22.231 ccw(c24.932,22.231) 24.932,21.361 ccw(c24.932,22.231) 25.801,22.231 ccw(c24.932,22.231) 24.932,23.101 ccw(c24.932,22.231)
  region: 25.509,24.643 ccw(c26.379,24.643) 26.379,23.773 ccw(c26.379,24.643) 27.249,24.643 ccw(c26.379,24.643) 26.379,25.513 ccw(c26.379,24.643)
  region: 22.856,24.643 ccw(c23.725,24.643) 23.725,23.773 ccw(c23.725,24.643) 24.595,24.643 ccw(c23.725,24.643) 23.725,25.513 ccw(c23.725,24.643)
  lines w0.254: -1.524,9.144 38.989,9.144 ; -1.524,14.351 38.989,14.351 ; -1.524,19.431 38.862,19.431 ; -1.524,27.432 38.989,27.432 ; 23.876,4.572 23.876,19.431 ; -1.524,4.572 38.989,4.572 38.989,38.182 -1.524,38.182 -1.524,4.572
  text "QR LABEL 40mmx10mm" at 36.957,31.623 h3.64
  text "Avensys" at 22.225,22.225 h3.74
  text "DESCR" at 37.846,16.256 h2.2
  text "BDP CTRL" at 22.098,16.129 h2.2
  text "CODE" at 37.846,11.176 h2.2
  text "AELEBDBPD01" at 22.479,11.049 h2.2
  text "C" at 62.865,6.985 h9.06
  text "1.1" at 22.479,6.223 h1.97
  text "VERSION PCB" at 37.973,6.223 h1.97
  text "7" at 53.34,5.334 h9.06
Dimension:
  the board outline again, w0
Mechanical 2:
  the board outline again, w0.1

## Dimensions
66.98,49.52 to 66.98,-2.54 on Mechanical 2
-2.159,50.038 to 66.98,49.52 on Mechanical 2

## Text inside footprints (layer, text, board x,y; h text height)
JP1: Top Overlay "3" at 25.862,45.093 h1.54 r90; Top Overlay "2" at 25.862,42.553 h1.54 r90; Top Overlay "1" at 25.862,40.013 h1.54 r90
LED1: Top Overlay "K" at 65.932,16.44 h1.47 r90
LED2: Top Overlay "K" at 65.932,8.82 h1.47 r90
LED3: Top Overlay "K" at 65.932,23.806 h1.47 r90
X4: Top Overlay "8" at 36.22,14.935 h1.97 r90; Top Overlay "7" at 38.811,13.716 h1.97 r90; Top Overlay "1" at 38.811,1.981 h1.97 r90; Top Overlay "2" at 36.195,2.972 h1.97 r90